# Altium PCB MacroPad_Pcb.PcbDoc
Units mil, origin at the board's own origin, x right, y up, seen from the top; angles counter-clockwise.
Board outline 6000 x 4000 mil, 2 copper layers (Top Layer, Bottom Layer); 74 components, 109 nets, 353 pads, 0 vias.
Unrouted connection lines stored in the file: 212.
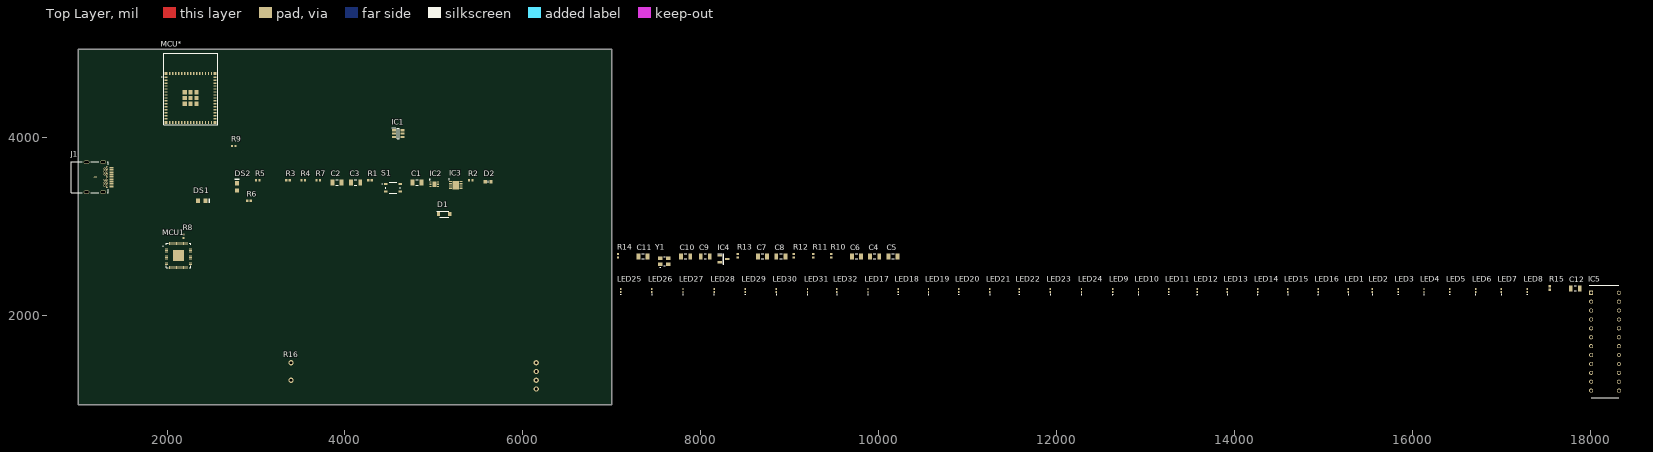
[diagram p0: Top Layer view]
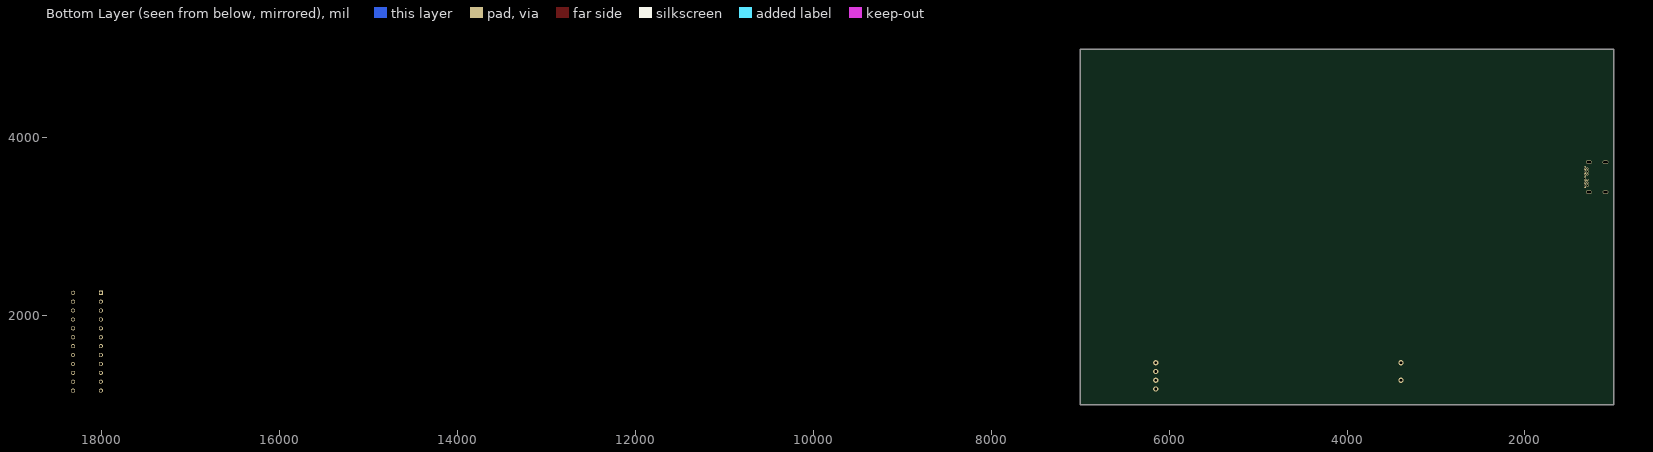
[diagram p1: Bottom Layer view, seen from below]

## Layer stack, top to bottom
Top Solder: solder mask 0.4, Solder Resist, Dk 3.5
Top Layer: signal copper 1.4
Dielectric 1: dielectric 12.6, FR-4, Dk 4.8
Bottom Layer: signal copper 1.4
Bottom Solder: solder mask 0.4, Solder Resist, Dk 3.5

## Board outline
1000,1000 7000,1000 7000,5000 1000,5000

## Design rules (kind name [scope] priority, off if disabled: settings)
Clearance [All] p1: gap=10 ignorepadtopadclearanceinfootprint=FALSE
DiffPairsRouting [All] p1: maxlimit=10 minlimit=10 mostfreqgap=10 toplayer_minwidth=15 toplayer_maxwidth=15 toplayer_prefwidth=15 bottomlayer_minwidth=15 bottomlayer_maxwidth=15 bottomlayer_prefwidth=15 maxuncoupledlength=500
PolygonConnect [All] p1: connectstyle=Relief reliefconductorwidth=10 reliefentries=4 polygonreliefangle="90 Angle" airgapwidth=10
RoutingVias [All] p1: holewidth=28 width=50 viastyle="Through Hole" minholewidth=28 minwidth=50 maxholewidth=28 maxwidth=50
SolderMaskExpansion [All] p1: expansion=4 istentingtop=FALSE
SupplyNets "Schematic Supply Nets_1" [InNet('RP-XIN')] p1: voltage=0.000
Width [All] p1: maxlimit=10 minlimit=10 preferedwidth=10
29 further rules are at their usual default settings.

## Classes and differential pairs
component class LEDmultiplex: C12 IC5 LED1 LED2 LED3 LED4 LED5 LED6 LED7 LED8 LED9 LED10 LED11 LED12 LED13 LED14 LED15 LED16 LED17 LED18 LED19 LED20 LED21 LED22 LED23 LED24 LED25 LED26 LED27 LED28 LED29 LED30 LED31 LED32 R15
component class MacroPad_schematics: C1 C2 C3 C4 C5 C6 C7 C8 C9 C10 C11 D1 D2 DS1 DS2 IC1 IC2 IC3 IC4 J1 MCU1 MCU* R1 R2 R3 R4 R5 R6 R7 R8 R9 R10 R11 R12 R13 R14 R16 S1 Y1
differential pair USB: +USB_P -USB_N
differential pair RP-USB: +RP-USB_P -RP-USB_N

## Components (designator, comment, footprint, x,y, rotation, side; value= is the part's Value field where it differs from the comment)
C1 "1206 Capacitor" KEMT-1206-2_L 4810,3500 r0 top value=0.1uF
C2 "1206 Capacitor" KEMT-1206-2_L 3910,3500 r0 top value=1uF
C3 "1206 Capacitor" KEMT-1206-2_L 4120,3500 r0 top value=2.2uF
C4 "1206 Capacitor" KEMT-1206-2_L 9955,2670 r0 top value=10uF
C5 "1206 Capacitor" KEMT-1206-2_L 10160,2670 r0 top value=0.1uF
C6 "1206 Capacitor" KEMT-1206-2_L 9750,2670 r0 top value=1uF
C7 "1206 Capacitor" KEMT-1206-2_L 8695,2670 r0 top value=0.1uF
C8 "1206 Capacitor" KEMT-1206-2_L 8900,2670 r0 top value=0.1uF
C9 "1206 Capacitor" KEMT-1206-2_L 8050,2670 r0 top value=10nF
C10 "1206 Capacitor" KEMT-1206-2_L 7830,2670 r0 top value=10nF
C11 "1206 Capacitor" KEMT-1206-2_L 7350,2670 r0 top value=10nF
C12 "1206 Capacitor" KEMT-1206-2_L 17830,2310 r0 top value=0.1uF
D1 "PMEG6020AELRX" SODFL3517X110N 5115,3145 r0 top
D2 "CG0603MLU-24E" DIONC1608X55N 5610,3510 r0 top
DS1 "HSMG-C170" AVAG-HSMX-C170_V 2390,3295 r0 top
DS2 "HSMG-C170" AVAG-HSMX-C170_V 2785,3450 r90 top
IC1 "USBLC6-2SC6" SOT95P280X145-6N 4599.21,4050 r0 top
IC2 "TLV76733DRVR" SON65P200X200X80-7N 5005,3480 r0 top
IC3 "TS3USB221DRCR" SON50P300X300X100-11N-D 5245,3470 r0 top
IC4 "LM4040BIM3-3.0_NOPB" SOT95P237X112-3N 8255,2640 r0 top
IC5 "MAX7219CNG" DIP794W56P254L3054H457Q24N 18165,1710 r0 top
J1 "632723300011" "WURTH 632723300011" 1152.87,3560 r270 top
LED1 "0402 White LED" LWVH8GQ2OO4M6N1 15280,2285 r90 top
LED2 "0402 White LED" LWVH8GQ2OO4M6N1 15550,2285 r90 top
LED3 "0402 White LED" LWVH8GQ2OO4M6N1 15840,2285 r90 top
LED4 "0402 White LED" LWVH8GQ2OO4M6N1 16130,2285 r90 top
LED5 "0402 White LED" LWVH8GQ2OO4M6N1 16420,2285 r90 top
LED6 "0402 White LED" LWVH8GQ2OO4M6N1 16710,2285 r90 top
LED7 "0402 White LED" LWVH8GQ2OO4M6N1 17000,2285 r90 top
LED8 "0402 White LED" LWVH8GQ2OO4M6N1 17290,2285 r90 top
LED9 "0402 White LED" LWVH8GQ2OO4M6N1 12630,2285 r90 top
LED10 "0402 White LED" LWVH8GQ2OO4M6N1 12920,2285 r90 top
LED11 "0402 White LED" LWVH8GQ2OO4M6N1 13260,2285 r90 top
LED12 "0402 White LED" LWVH8GQ2OO4M6N1 13580,2285 r90 top
LED13 "0402 White LED" LWVH8GQ2OO4M6N1 13920,2285 r90 top
LED14 "0402 White LED" LWVH8GQ2OO4M6N1 14260,2285 r90 top
LED15 "0402 White LED" LWVH8GQ2OO4M6N1 14600,2285 r90 top
LED16 "0402 White LED" LWVH8GQ2OO4M6N1 14940,2285 r90 top
LED17 "0402 White LED" LWVH8GQ2OO4M6N1 9880,2285 r90 top
LED18 "0402 White LED" LWVH8GQ2OO4M6N1 10220,2285 r90 top
LED19 "0402 White LED" LWVH8GQ2OO4M6N1 10560,2285 r90 top
LED20 "0402 White LED" LWVH8GQ2OO4M6N1 10900,2285 r90 top
LED21 "0402 White LED" LWVH8GQ2OO4M6N1 11250,2285 r90 top
LED22 "0402 White LED" LWVH8GQ2OO4M6N1 11580,2285 r90 top
LED23 "0402 White LED" LWVH8GQ2OO4M6N1 11930,2285 r90 top
LED24 "0402 White LED" LWVH8GQ2OO4M6N1 12280,2285 r90 top
LED25 "0402 White LED" LWVH8GQ2OO4M6N1 7100,2285 r90 top
LED26 "0402 White LED" LWVH8GQ2OO4M6N1 7450,2285 r90 top
LED27 "0402 White LED" LWVH8GQ2OO4M6N1 7800,2285 r90 top
LED28 "0402 White LED" LWVH8GQ2OO4M6N1 8150,2285 r90 top
LED29 "0402 White LED" LWVH8GQ2OO4M6N1 8500,2285 r90 top
LED30 "0402 White LED" LWVH8GQ2OO4M6N1 8850,2285 r90 top
LED31 "0402 White LED" LWVH8GQ2OO4M6N1 9200,2285 r90 top
LED32 "0402 White LED" LWVH8GQ2OO4M6N1 9530,2285 r90 top
MCU1 "" SC091413 2130,2680 r0 top
MCU* "ESP32-S3-mini" ESP32S3MINI1N8 2265,4450.04 r0 top
R1 "0402 Resistor" RESC1005X40X25ML05T05 4280,3525 r0 top value=499k
R2 "0402 Resistor" RESC1005X40X25ML05T05 5415,3525 r0 top value=10k
R3 "0402 Resistor" RESC1005X40X25ML05T05 3360,3525 r0 top value=5.1k
R4 "0402 Resistor" RESC1005X40X25ML05T05 3530,3525 r0 top value=10k
R5 "0402 Resistor" RESC1005X40X25ML05T05 3020,3525 r0 top value=150
R6 "0402 Resistor" RESC1005X40X25ML05T05 2920.32,3295 r180 top value=56
R7 "0402 Resistor" RESC1005X40X25ML05T05 3700,3525 r0 top value=160k
R8 "0402 Resistor" RESC1005X40X25ML05T05 2185,2895.31 r90 top value=27.4
R9 "0402 Resistor" RESC1005X40X25ML05T05 2750,3910 r0 top value=27.4
R10 "0402 Resistor" RESC1005X40X25ML05T05 9465,2675 r90 top value=10k
R11 "0402 Resistor" RESC1005X40X25ML05T05 9265,2675 r90 top value=150
R12 "0402 Resistor" RESC1005X40X25ML05T05 9045,2675 r90 top value=5.1k
R13 "0402 Resistor" RESC1005X40X25ML05T05 8415,2675 r90 top value=10k
R14 "0402 Resistor" RESC1005X40X25ML05T05 7070,2675 r90 top value=1k
R15 "0402 Resistor" RESC1005X40X25ML05T05 17545,2315 r90 top
R16 "b10k linear pot" b10k 6150,1178.15 r90 top
S1 "PTS810SJK250SMTR_LFS" PTS810SJK250SMTRLFS 4540,3440 r0 top
Y1 "ABM8-272-T3" ABM8272T3 7590,2615 r0 top

## Footprints (in the part's own frame and the unit in brackets; to place one, negate y for a bottom-side part, rotate by r counter-clockwise, add the part's x,y. Pads: shape width x height; smd on the part's side, far side on the other; paste and mask are expansions set on the pad)
ABM8272T3 [mm]
  rect 1.3x1.05 smd: 1(-1.15,-0.875) 2(1.15,-0.875) 3(1.15,0.875) 4(-1.15,0.875)
  silkscreen extent -1.2,-1.9 0.2,1.25, body extent -1.6,-1.25 1.6,1.25, height 0.75
AVAG-HSMX-C170_V [mm] "SMD, 2-Leads, Body 2x1.25mm, Height 0.8mm"
  rect 1.2x1.2 smd: 1(-1.05,0) 2(1.05,0)
  silkscreen extent 2.15,-0.63 2.15,0.63, body extent -1,-0.63 1,0.63, height 0.8
b10k [mil] "b10k"
  round 60 hole 30: 1(0,0) 2(98.43,0) 3(196.85,0) 4(295.28,0) 5(98.43,2755.91) 6(295.28,2755.91)
  body extent -30,-98 325,2854, height 874
DIONC1608X55N [mm]
  rect 0.95x1 smd: 1(-0.8,0) 2(0.8,0)
  silkscreen extent 0,-0.3 0,0.3, body extent -0.8,-0.4 0.8,0.4, height 0.55
DIP794W56P254L3054H457Q24N [mm]
  rect 1.16x1.16 hole 0.76: 1(-3.97,13.97)
  round 1.16 hole 0.76: 2(-3.97,11.43) 3(-3.97,8.89) 4(-3.97,6.35) 5(-3.97,3.81) 6(-3.97,1.27) 7(-3.97,-1.27) 8(-3.97,-3.81) 9(-3.97,-6.35) 10(-3.97,-8.89) 11(-3.97,-11.43) 12(-3.97,-13.97) 13(3.97,-13.97) 14(3.97,-11.43) 15(3.97,-8.89) 16(3.97,-6.35) 17(3.97,-3.81) 18(3.97,-1.27) 19(3.97,1.27) 20(3.97,3.81) 21(3.97,6.35) 22(3.97,8.89) 23(3.97,11.43) 24(3.97,13.97)
  silkscreen extent -4.55,-16.06 3.94,16.06, body extent -4.11,-15.27 4.11,15.27, height 4.57
ESP32S3MINI1N8 [mm]
  rect 0.8x0.4 smd: 1(-7,5.95) 2(-7,5.1) 3(-7,4.25) 4(-7,3.4) 5(-7,2.55) 6(-7,1.7) 7(-7,0.85) 8(-7,0) 9(-7,-0.85) 10(-7,-1.7) 11(-7,-2.55) 12(-7,-3.4) 13(-7,-4.25) 14(-7,-5.1) 15(-7,-5.95) 31(7,-5.95) 32(7,-5.1) 33(7,-4.25) 34(7,-3.4) 35(7,-2.55) 36(7,-1.7) 37(7,-0.85) 38(7,0) 39(7,0.85) 40(7,1.7) 41(7,2.55) 42(7,3.4) 43(7,4.25) 44(7,5.1) 45(7,5.95)
  rect 0.4x0.8 smd: 16(-5.95,-7) 17(-5.1,-7) 18(-4.25,-7) 19(-3.4,-7) 20(-2.55,-7) 21(-1.7,-7) 22(-0.85,-7) 23(0,-7) 24(0.85,-7) 25(1.7,-7) 26(2.55,-7) 27(3.4,-7) 28(4.25,-7) 29(5.1,-7) 30(5.95,-7) 46(5.95,7) 47(5.1,7) 48(4.25,7) 49(3.4,7) 50(2.55,7) 51(1.7,7) 52(0.85,7) 53(0,7) 54(-0.85,7) 55(-1.7,7) 56(-2.55,7) 57(-3.4,7) 58(-4.25,7) 59(-5.1,7) 60(-5.95,7)
  rect 1.2x1.2 smd: 61(0,0) 66(-1.65,1.65) 67(-1.65,0) 68(-1.65,-1.65) 69(0,-1.65) 70(1.65,-1.65) 71(1.65,0) 72(1.65,1.65) 73(0,1.65)
  rect 0.8x0.8 smd: 62(-7,7) 63(-7,-7) 64(7,-7) 65(7,7)
  silkscreen extent -8.3,-7.7 7.7,12.8, body extent -7.7,-7.7 7.7,12.81, height 2.55
KEMT-1206-2_L [mm] "SMD, 2-Leads, Body 3.4x1.8mm, IPC High Density"
  rect 1.1x1.7 smd: 1(-1.3,0) 2(1.3,0)
  silkscreen extent -0.35,-0.75 0.35,0.75, body extent -1.7,-0.9 1.7,0.9, height 0.88
LWVH8GQ2OO4M6N1 [mm]
  rect 0.5x0.4 smd: 1(-0.425,0) 2(0.425,0)
  silkscreen extent -1.2,-0.05 -1.1,0.05, body extent -0.5,-0.42 0.5,0.15, height 0.45
PTS810SJK250SMTRLFS [mm]
  rect 1.05x0.65 smd: 1(-2.075,1.075) 2(2.075,1.075) 3(-2.075,-1.075) 4(2.075,-1.075)
  silkscreen extent -3.1,-1.6 2.1,1.6, body extent -2.3,-1.6 2.3,1.6, height 2.7
RESC1005X40X25ML05T05 [mm] "Chip Resistor, 2-Leads, Body 1.05x0.55mm, IPC Low Density"
  rect 0.65x0.65 smd: 1(-0.5,0) 2(0.5,0)
  body extent -0.53,-0.28 0.53,0.28, height 0.4
SC091413 [mm]
  rect 0.875x0.2 smd: 1(-3.438,2.6) 2(-3.438,2.2) 3(-3.438,1.8) 4(-3.438,1.4) 5(-3.438,1) 6(-3.438,0.6) 7(-3.438,0.2) 8(-3.438,-0.2) 9(-3.438,-0.6) 10(-3.438,-1) 11(-3.438,-1.4) 12(-3.438,-1.8) 13(-3.438,-2.2) 14(-3.438,-2.6) 29(3.438,-2.6) 30(3.438,-2.2) 31(3.438,-1.8) 32(3.438,-1.4) 33(3.438,-1) 34(3.438,-0.6) 35(3.438,-0.2) 36(3.438,0.2) 37(3.438,0.6) 38(3.438,1) 39(3.438,1.4) 40(3.438,1.8) 41(3.438,2.2) 42(3.438,2.6)
  rect 0.2x0.875 smd: 15(-2.6,-3.438) 16(-2.2,-3.438) 17(-1.8,-3.438) 18(-1.4,-3.438) 19(-1,-3.438) 20(-0.6,-3.438) 21(-0.2,-3.438) 22(0.2,-3.438) 23(0.6,-3.438) 24(1,-3.438) 25(1.4,-3.438) 26(1.8,-3.438) 27(2.2,-3.438) 28(2.6,-3.438) 43(2.6,3.438) 44(2.2,3.438) 45(1.8,3.438) 46(1.4,3.438) 47(1,3.438) 48(0.6,3.438) 49(0.2,3.438) 50(-0.2,3.438) 51(-0.6,3.438) 52(-1,3.438) 53(-1.4,3.438) 54(-1.8,3.438) 55(-2.2,3.438) 56(-2.6,3.438)
  rect 3.2x3.2 smd: 57(0,0)
  silkscreen extent -4.5,-3.5 3.5,3.5, body extent -3.5,-3.5 3.5,3.5, height 0.92
SODFL3517X110N [mm]
  rect 0.92x1.08 smd: 1(-1.6,0) 2(1.6,0)
  silkscreen extent -2.06,-0.85 1.3,0.85, body extent -1.75,-1 1.75,1, height 1.07
SON50P300X300X100-11N-D [mm]
  rect 0.8x0.3 smd: 1(-1.5,1) 2(-1.5,0.5) 3(-1.5,0) 4(-1.5,-0.5) 5(-1.5,-1) 6(1.5,-1) 7(1.5,-0.5) 8(1.5,0) 9(1.5,0.5) 10(1.5,1)
  rect 1.75x2.5 smd: 11(0,0)
  silkscreen extent -2.02,1.53 -1.77,1.77, body extent -1.5,-1.5 1.5,1.5, height 1
SON65P200X200X80-7N [mm]
  rect 0.6x0.35 smd: 1(-1.05,0.65) 2(-1.05,0) 3(-1.05,-0.65) 4(1.05,-0.65) 5(1.05,0) 6(1.05,0.65)
  rect 1.1x1.7 smd: 7(0,0)
  silkscreen extent -1.47,1.2 -1.22,1.45, body extent -1,-1 1,1, height 0.8
SOT95P237X112-3N [mm]
  rect 1.25x0.6 smd: 1(-1.05,0.95) 2(-1.05,-0.95) 3(1.05,0)
  silkscreen extent -1.68,-1.46 0.08,1.5, body extent -1.27,-1.46 1.27,1.46, height 1
SOT95P280X145-6N [mm]
  rect 1.2x0.6 smd: 1(-1.25,0.95) 2(-1.25,0) 3(-1.25,-0.95) 4(1.25,-0.95) 5(1.25,0) 6(1.25,0.95)
  silkscreen extent -1.85,-1.46 0.3,1.6, body extent -1.4,-1.46 1.4,1.46, height 1.45
"WURTH 632723300011" [mm]
  oval 0.3x1.2 smd: A1(-2.75,5.65) A2(-2.25,5.65) A3(-1.75,5.65) A4(-1.25,5.65) A5(-0.75,5.65) A6(-0.25,5.65) A7(0.25,5.65) A8(0.75,5.65) A9(1.25,5.65) A10(1.75,5.65) A11(2.25,5.65) A12(2.75,5.65)
  round 0.65 hole 0.4: B1(2.8,4.4) B2(2.4,3.7) B3(1.6,3.7) B4(1.2,4.4) B5(0.8,3.7) B6(0.4,4.4) B7(-0.4,4.4) B8(-0.8,3.7) B9(-1.2,4.4) B10(-1.6,3.7) B11(-2.4,3.7) B12(-2.8,4.4) S(-2,4.4) S(2,4.4)
  oval 1x1.6 hole 1.2 slot 0.6 at 0 deg: S(-4.27,3.25) S(-4.27,-1.48) S(4.27,3.25) S(4.27,-1.48)
  oval 0.2x1 smd: S(0,1.07) S(0.025,-2.03)
  silkscreen extent -4.4,-5.9 4.43,4.75, body extent -4.37,-5.89 4.37,5.9, height 3.06

## Part data
C1 C2 C3 C4 C5 C6 C7 C8 C9 C10 C11 C12: library part CMP-001-00000-5, "General Purpose Capacitor", Capacitor Type=Ceramic, Case/Package=1206, Max Operating Temperature=125°C, Min Operating Temperature=-55°C, Tolerance=10%, Voltage Rating=50V, RoHS Compliant=Yes
D1: "Schottky Diode", Manufacturer_Name=Nexperia, Mouser Part Number=771-PMEG6020AELRX, Arrow Part Number=PMEG6020AELRX, Arrow Price/Stock=https://www.arrow.com/en/products/pmeg6020aelrx/nexperia?utm_currency=USD&region=nac, Datasheet Link=https://assets.nexperia.com/documents/data-sheet/PMEG6020AELR.pdf, Height=1.1mm, Manufacturer_Part_Number=PMEG6020AELRX, Mouser Price/Stock=https://www.mouser.co.uk/ProductDetail/Nexperia/PMEG6020AELRX?qs=bel5lzaZNxSSRPwNuBp8ow%3D%3D
D2: "Diode ESD (Uni-directional)", Manufacturer_Name=Bourns, Mouser Part Number=652-CG0603MLU-24E, Arrow Part Number=CG0603MLU-24E, Arrow Price/Stock=https://www.arrow.com/en/products/cg0603mlu-24e/bourns?region=nac, Datasheet Link=https://datasheet.datasheetarchive.com/originals/dk/DKDS-12/224865.pdf, Height=0.55mm, Manufacturer_Part_Number=CG0603MLU-24E, Mouser Price/Stock=https://www.mouser.co.uk/ProductDetail/Bourns/CG0603MLU-24E?qs=m8myXnDJXpWyvsqQ2sWN8w%3D%3D
DS1 DS2: library part CMP-007-00001-1, "Led 570NM Green Diff 0805 SMD", Case/Package=0805, Forward Current=20mA, Forward Voltage=2.2V, Max Operating Temperature=85°C, Min Operating Temperature=-30°C, RoHS Compliant=Yes
IC1: "Integrated Circuit", Manufacturer_Name=STMicroelectronics, Mouser Part Number=511-USBLC6-2SC6, Arrow Part Number=USBLC6-2SC6, Arrow Price/Stock=https://www.arrow.com/en/products/usblc6-2sc6/stmicroelectronics?utm_currency=USD&region=europe, Datasheet Link=http://www.st.com/st-web-ui/static/active/en/resource/technical/document/datasheet/CD00050750.pdf, Height=1.45mm, Manufacturer_Part_Number=USBLC6-2SC6, Mouser Price/Stock=https://www.mouser.co.uk/ProductDetail/STMicroelectronics/USBLC6-2SC6?qs=po45yt2pPpu%2FhNIlwQdTlg%3D%3D
IC2: "Integrated Circuit", Manufacturer_Name="Texas Instruments", Mouser Part Number=595-TLV76733DRVR, Arrow Part Number=TLV76733DRVR, Arrow Price/Stock=https://www.arrow.com/en/products/tlv76733drvr/texas-instruments?utm_currency=USD&region=europe, Datasheet Link=http://www.ti.com/lit/gpn/TLV767, Height=0.8mm, Manufacturer_Part_Number=TLV76733DRVR, Mouser Price/Stock=https://www.mouser.co.uk/ProductDetail/Texas-Instruments/TLV76733DRVR?qs=9r4v7xj2LnmGIkwTuPlHig%3D%3D
IC3: "Integrated Circuit", Manufacturer_Name="Texas Instruments", Mouser Part Number=595-TS3USB221DRCR, Arrow Part Number=TS3USB221DRCR, Arrow Price/Stock=https://www.arrow.com/en/products/ts3usb221drcr/texas-instruments?utm_currency=USD&region=nac, Datasheet Link=http://www.ti.com/lit/gpn/ts3usb221, Height=1mm, Manufacturer_Part_Number=TS3USB221DRCR, Mouser Price/Stock=https://www.mouser.co.uk/ProductDetail/Texas-Instruments/TS3USB221DRCR?qs=C701iA%252BXzMyUL1Y8NYRziA%3D%3D
IC4: "Integrated Circuit", Arrow Part Number=LM4040BIM3-3.0/NOPB, Manufacturer_Name="Texas Instruments", Mouser Part Number=926-LM4040BIM330NOPB, Arrow Price/Stock=https://www.arrow.com/en/products/lm4040bim3-3.0nopb/texas-instruments?region=nac, Datasheet Link=http://www.ti.com/lit/gpn/lm4040-n, Height=1.12mm, Manufacturer_Part_Number=LM4040BIM3-3.0/NOPB, Mouser Price/Stock=https://www.mouser.co.uk/ProductDetail/Texas-Instruments/LM4040BIM3-3.0-NOPB?qs=QbsRYf82W3FThDimo07Imw%3D%3D
IC5: "Integrated Circuit", Manufacturer_Name="Analog Devices", Mouser Part Number=700-MAX7219CNG-NR, Datasheet Link=https://datasheets.maximintegrated.com/en/ds/MAX7219-MAX7221.pdf, Height=4.572mm, Manufacturer_Part_Number=MAX7219CNG, Mouser Price/Stock=https://www.mouser.co.uk/ProductDetail/Analog-Devices-Maxim-Integrated/MAX7219CNG?qs=p6VZ%252BklCkRToQRlZGegBBA%3D%3D
J1: "CONN RCP USB3.1 TYPEC 24P SMD RA", Current Rating (Amps)=5A, Manufacturer="Würth Elektronik", Operating Temperature="-40°C ~ 105°C", Supplier Part Number 1=732-9618-1-ND, Voltage - Rated=20VDC, ComponentLink1Description=Datasheet, ComponentLink1URL=https://katalog.we-online.de/em/datasheet/632723x00011.pdf, ComponentLink2Description="DigiKey Link", ComponentLink2URL=http://digikey.com/product-detail/en/w-rth-elektronik/632723300011/732-9618-1-ND/5806673, Connector Type="USB - C (Type - C)", Gender=Receptacle, LastUpdated="24/05/2020 22:36:40", Lifecycle Status=Active, Mating Cycles=10000, Minimum Order=1, Mounting Feature=Horizontal, Mounting Type="Surface Mount, Right Angle; Through Hole", Number of Contacts=24, Number of Ports=1, Packaging=TapeAndReel, Part Number=632723300011, Part Status=Active, Price=2.95, Series=WR-COM, Shielding=Unshielded, Specifications="USB 3.1 (USB 3.1 Gen 2, Superspeed+)", Supplier 1=DigiKey, Termination=Solder
LED1 LED2 LED3 LED4 LED5 LED6 LED7 LED8 LED9 LED10 LED11 LED12 LED13 LED14 LED15 LED16 LED17 LED18 LED19 LED20 LED21 LED22 LED23 LED24 LED25 LED26 LED27 LED28 LED29 LED30 LED31 LED32: library part LW_VH8G-Q2OO-4M6N-1, "LED", Manufacturer_Name="ams OSRAM", Manufacturer_Part_Number="LW VH8G-Q2OO-4M6N-1", Mouser Part Number=720-LWVH8G-Q2S24M6N1, Datasheet Link=https://look.ams-osram.com/m/6a061397583b7b2c/original/LW-VH8G.pdf, Height=0.35mm, Mouser Price/Stock=https://www.mouser.co.uk/ProductDetail/ams-OSRAM/LW-VH8G-Q2OO-4M6N-1?qs=%252BEew9%252B0nqrAt4wn7N3MZJQ%3D%3D
MCU1: library part SC0914_13_, "ARM mcu", Manufacturer_Name=RASPBERRY-PI, Manufacturer_Part_Number=SC0914(13), Mouser Part Number=358-SC091413, Datasheet Link=https://datasheets.raspberrypi.com/rp2040/rp2040-datasheet.pdf, Height=0.9mm, Mouser Price/Stock=https://www.mouser.co.uk/ProductDetail/Raspberry-Pi/SC091413?qs=T%252BzbugeAwjhr%252BUbBr3TJcw%3D%3D
MCU*: library part CMP-120-000000-1, Design Item ID=ESP32-S3-mini, Source=MacroPad_schematicsLibrary.SchLib
R1 R2 R3 R4 R5 R6 R7 R10 R11 R12 R13 R14 R15: library part CMP-009-00003-5, "General Purpose 0402 Resistor", Max Operating Temperature=155°C, Min Operating Temperature=-55°C, Package Height=0.35mm, Package Length=1mm, Package Shape=Rectangular, Package Style=SMTMeter, Package Width=0.5mm, Rated Power Dissipation (P)=100mW, Rated Temperature=70°C, Resistance=100R, Resistor Type="FIXED RESISTOR", Temperature Coefficient=100ppm/°C, Tolerance=1%, Working Voltage=50V, Construction=Rectangular, JESD-609 Code=e3, Mount="Surface Mount", Number of Pins=2, Packaging="Tape and Reel", REACH SVHC=Yes, Reference Standard=AEC-Q200, RoHS Compliant=Yes, Size Code=0402, Technology="METAL GLAZE/THICK FILM", Terminal Finish=Nickel, Termination=Wraparound
R8 R9: library part CMP-009-00003-5, "General Purpose 0402 Resistor", Max Operating Temperature=155°C, Min Operating Temperature=-55°C, Package Height=0.35mm, Package Length=1mm, Package Shape=Rectangular, Package Style=SMTMeter, Package Width=0.5mm, Rated Power Dissipation (P)=100mW, Rated Temperature=70°C, Resistor Type="FIXED RESISTOR", Temperature Coefficient=100ppm/°C, Tolerance=1%, Working Voltage=50V, Construction=Rectangular, JESD-609 Code=e3, Mount="Surface Mount", Number of Pins=2, Packaging="Tape and Reel", REACH SVHC=Yes, Reference Standard=AEC-Q200, RoHS Compliant=Yes, Size Code=0402, Technology="METAL GLAZE/THICK FILM", Terminal Finish=Nickel, Termination=Wraparound
S1: "Switch", Manufacturer_Name="C & K COMPONENTS", Manufacturer_Part_Number="PTS810SJK250SMTR LFS", Mouser Part Number=611-PTS810SJK250SMTR, Datasheet Link=https://www.ckswitches.com/media/1476/pts810.pdf, Height=2.7mm, Mouser Price/Stock=https://www.mouser.co.uk/ProductDetail/CK/PTS810SJK250SMTR-LFS?qs=Imq1NPwxi77Ow0tzRIznfA%3D%3D
Y1: "Crystal or Oscillator", Manufacturer_Name=ABRACON, Mouser Part Number=815-ABM8-272-T3, Datasheet Link=https://abracon.com/datasheets/ABM8-272-T3.pdf, Height=0.8mm, Manufacturer_Part_Number=ABM8-272-T3, Mouser Price/Stock=https://www.mouser.co.uk/ProductDetail/ABRACON/ABM8-272-T3?qs=QpmGXVUTftEj6miOiJBMxQ%3D%3D

## Nets (pads, with @x,y where several pads share a name; then routed paths per layer and width w, separated by ;. In a path a pad name is that pad's centre, name@x,y a point inside that pad or via, vN(x,y) a via of type N, cw(c..) or ccw(c..) an arc to the next point about the centre after c; other vN are vias at no path point)
+3V3: C3.1 C4.1 C5.1 IC2.1 IC3.10 MCU*.3 R1.2 R2.2 R4.2 R6.2 R10.2 R11.2 R13.2
+5V: C2.1 D1.1 D2.1 IC2.4 IC2.6 R5.2 R16.5 R16.6
ADC-VREF: C9.2 IC4.1 MCU1.43 R13.1
BOOTSEL: IC3.9 MCU1.56 R2.1 S1.3 S1.4
COL1: IC5.14 LED1.1 LED9.1 LED17.1 LED25.1
COL2: IC5.16 LED2.1 LED10.1 LED18.1 LED26.1
COL3: IC5.20 LED3.1 LED11.1 LED19.1 LED27.1
COL4: IC5.23 LED4.1 LED12.1 LED20.1 LED28.1
COL5: IC5.21 LED5.1 LED13.1 LED21.1 LED29.1
COL6: IC5.15 LED6.1 LED14.1 LED22.1 LED30.1
COL7: IC5.17 LED7.1 LED15.1 LED23.1 LED31.1
COL8: IC5.22 LED8.1 LED16.1 LED24.1 LED32.1
ESP-BOOT: C7.2 MCU*.4
ESP-GPIO1: MCU*.5
ESP-GPIO2: MCU*.6
ESP-GPIO3: MCU*.7
ESP-GPIO4: MCU*.8
ESP-GPIO5: MCU*.9
ESP-GPIO6: MCU*.10
ESP-GPIO7: MCU*.11
ESP-GPIO8: MCU*.12
ESP-GPIO9: MCU*.13
ESP-GPIO10: MCU*.14
ESP-GPIO11: MCU*.15
ESP-GPIO12: MCU*.16
ESP-GPIO13: MCU*.17
ESP-GPIO14: MCU*.18
ESP-GPIO15: MCU*.19
ESP-GPIO16: MCU*.20
ESP-GPIO17: MCU*.21
ESP-GPIO21: MCU*.25
ESP-GPIO26: MCU*.26
ESP-GPIO33: MCU*.28
ESP-GPIO34: MCU*.29
ESP-GPIO35: MCU*.31
ESP-GPIO36: MCU*.32
ESP-GPIO37: MCU*.33
ESP-GPIO38: MCU*.34
ESP-GPIO39: MCU*.35
ESP-GPIO40: MCU*.36
ESP-GPIO41: MCU*.37
ESP-GPIO42: MCU*.38
ESP-GPIO45: MCU*.41
ESP-GPIO46: MCU*.44
ESP-GPIO47: MCU*.27
ESP-GPIO48: MCU*.30
ESP-RESET: C6.1 C8.2 MCU*.45 R4.1
ESP-USB_N: IC3.3 MCU*.23
ESP-USB_P: IC3.4 MCU*.24
NetC1_1: C1.1 D1.2 IC1.5 J1.A4 J1.A9 J1.B4 J1.B9
NetC11_2: C11.2 R14.2 Y1.3
NetC12_1: C12.1 IC5.19 R15.2
NetC12_2: C12.2
NetDS1_1: DS1.1 R5.1
NetDS2_1: DS2.1 R6.1
NetIC1_1: IC1.1 J1.A6 J1.B6
NetIC1_3: IC1.3 J1.A7 J1.B7
NetIC2_2: IC2.2 R1.1 R7.2
NetIC5_1: IC5.1
NetIC5_12: IC5.12
NetIC5_13: IC5.13
NetIC5_18: IC5.18 R15.1
NetIC5_24: IC5.24
NetJ1_A5: J1.A5 R12.2
NetJ1_B5: J1.B5 R3.2
NetMCU1_46: MCU1.46 R8.2
NetMCU1_47: MCU1.47 R9.2
NetMCU*_22: MCU*.22 R10.1
ROW1: IC5.2 LED1.2 LED2.2 LED3.2 LED4.2 LED5.2 LED6.2 LED7.2 LED8.2
ROW2: IC5.6 LED9.2 LED10.2 LED11.2 LED12.2 LED13.2 LED14.2 LED15.2 LED16.2
ROW3: IC5.7 LED17.2 LED18.2 LED19.2 LED20.2 LED21.2 LED22.2 LED23.2 LED24.2
ROW4: IC5.3 LED25.2 LED26.2 LED27.2 LED28.2 LED29.2 LED30.2 LED31.2 LED32.2
RP3V3: MCU1.1 MCU1.10 MCU1.22 MCU1.33 MCU1.42 MCU1.48 MCU1.49
RP-GPIO0: MCU1.2
RP-GPIO1: MCU1.3
RP-GPIO2: MCU1.4
RP-GPIO3: MCU1.5
RP-GPIO4: MCU1.6
RP-GPIO5: MCU1.7
RP-GPIO6: MCU1.8
RP-GPIO7: MCU1.9
RP-GPIO8: MCU1.11
RP-GPIO9: MCU1.12
RP-GPIO10: MCU1.13
RP-GPIO11: MCU1.14
RP-GPIO12: MCU1.15
RP-GPIO13: MCU1.16
RP-GPIO14: MCU1.17
RP-GPIO15: MCU1.18
RP-GPIO16: MCU1.27
RP-GPIO17: MCU1.28
RP-GPIO18: MCU1.29
RP-GPIO19: MCU1.30
RP-GPIO20: MCU1.31
RP-GPIO21: MCU1.32
RP-GPIO22: MCU1.34
RP-GPIO23: MCU1.35
RP-GPIO24: MCU1.36
RP-GPIO25: MCU1.37
RP-GPIO26: MCU1.38
RP-GPIO27: MCU1.39
RP-GPIO28: MCU1.40
RP-GPIO29: MCU1.41
RP-USB_N: IC3.1 R8.1
RP-USB_P: IC3.2 R9.1
RP-XIN: C1.2 C2.2 C3.2 C4.2 C5.2 C6.2 C7.1 C8.1 C9.1 C10.1 C10.2 C11.1 D2.2 DS1.2 DS2.2 IC1.2 IC2.3 IC2.5 IC2.7 IC3.5 IC3.6 IC3.11 IC4.2 IC5.4 IC5.9 J1.A1 J1.A12 J1.B1 J1.B12 J1.S MCU1.19 MCU1.20 MCU1.57 MCU*.1 MCU*.2 MCU*.42 MCU*.43 MCU*.46 MCU*.47 MCU*.48 MCU*.49 MCU*.50 MCU*.51 MCU*.52 MCU*.53 MCU*.54 MCU*.55 MCU*.56 MCU*.57 MCU*.58 MCU*.59 MCU*.60 MCU*.61 MCU*.62 MCU*.63 MCU*.64 MCU*.65 MCU*.66 MCU*.67 MCU*.68 MCU*.69 MCU*.70 MCU*.71 MCU*.72 MCU*.73 R3.1 R7.1 R12.1 R16.2 R16.4 S1.1 S1.2 Y1.1 Y1.2 Y1.4
RP-XOUT: MCU1.21 R14.1
USB_N: IC1.4 IC3.7
USB_P: IC1.6 IC3.8
pads on no net: IC4.3 IC5.5 IC5.8 IC5.10 IC5.11 J1.A2 J1.A3 J1.A8 J1.A10 J1.A11 J1.B2 J1.B3 J1.B8 J1.B10 J1.B11 MCU1.23 MCU1.24 MCU1.25 MCU1.26 MCU1.44 MCU1.45 MCU1.50 MCU1.51 MCU1.52 MCU1.53 MCU1.54 MCU1.55 MCU*.39 MCU*.40 R11.1 R16.1 R16.3